# Altium PCB PCB1.PcbDoc
Units mm, origin at the board's own origin, x right, y up, seen from the top; angles counter-clockwise.
Board outline 100.08 x 100.08 mm, 2 copper layers (Top Layer, Bottom Layer); 19 components, 29 nets, 101 pads, 0 vias.
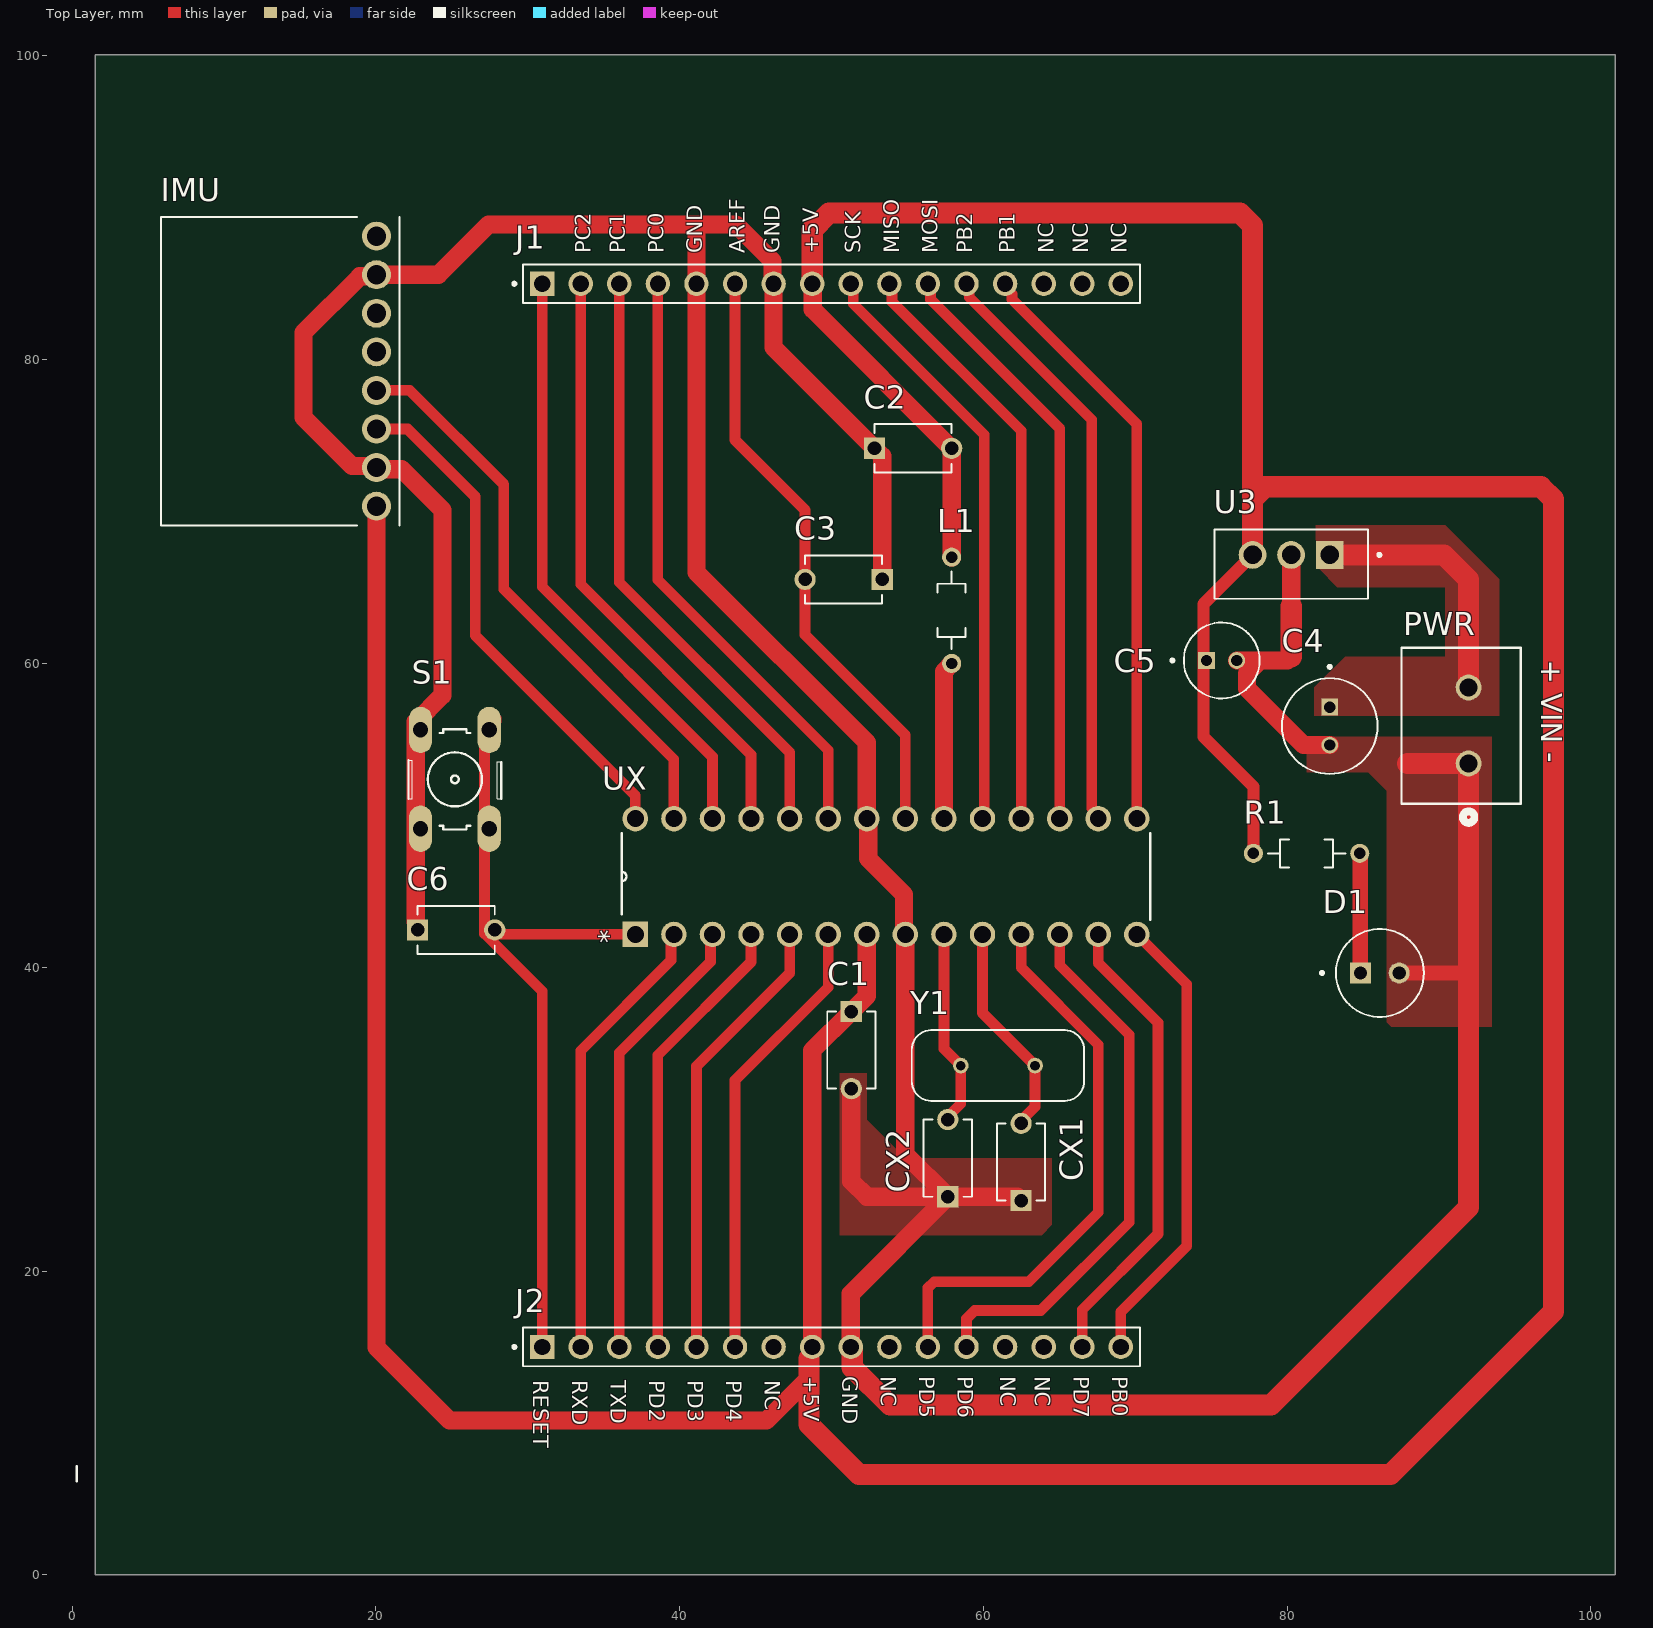
[diagram p0: Top Layer view]
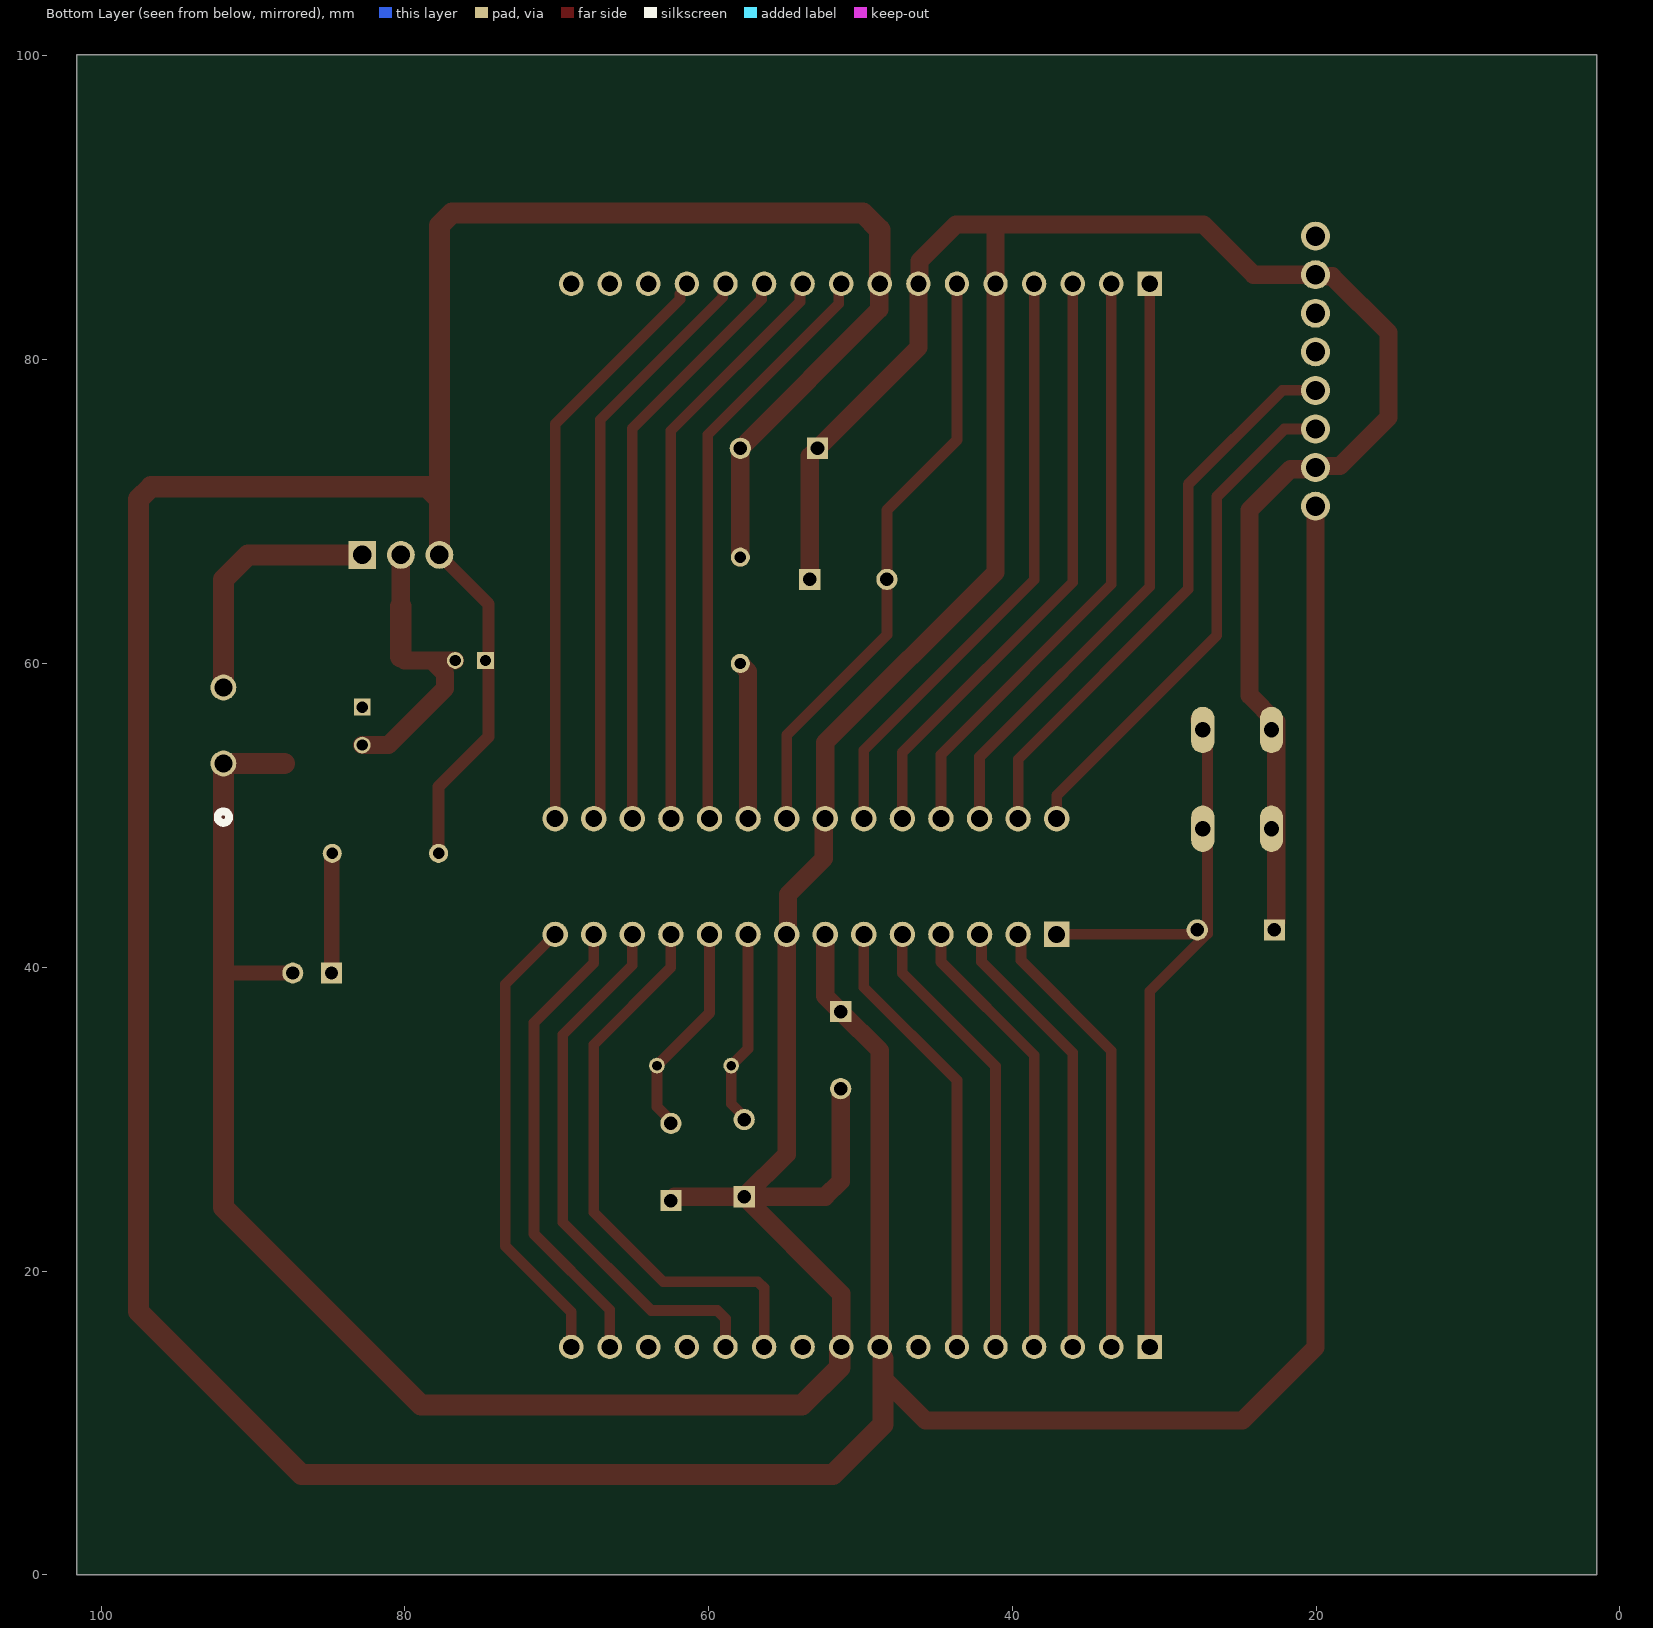
[diagram p1: Bottom Layer view, seen from below]
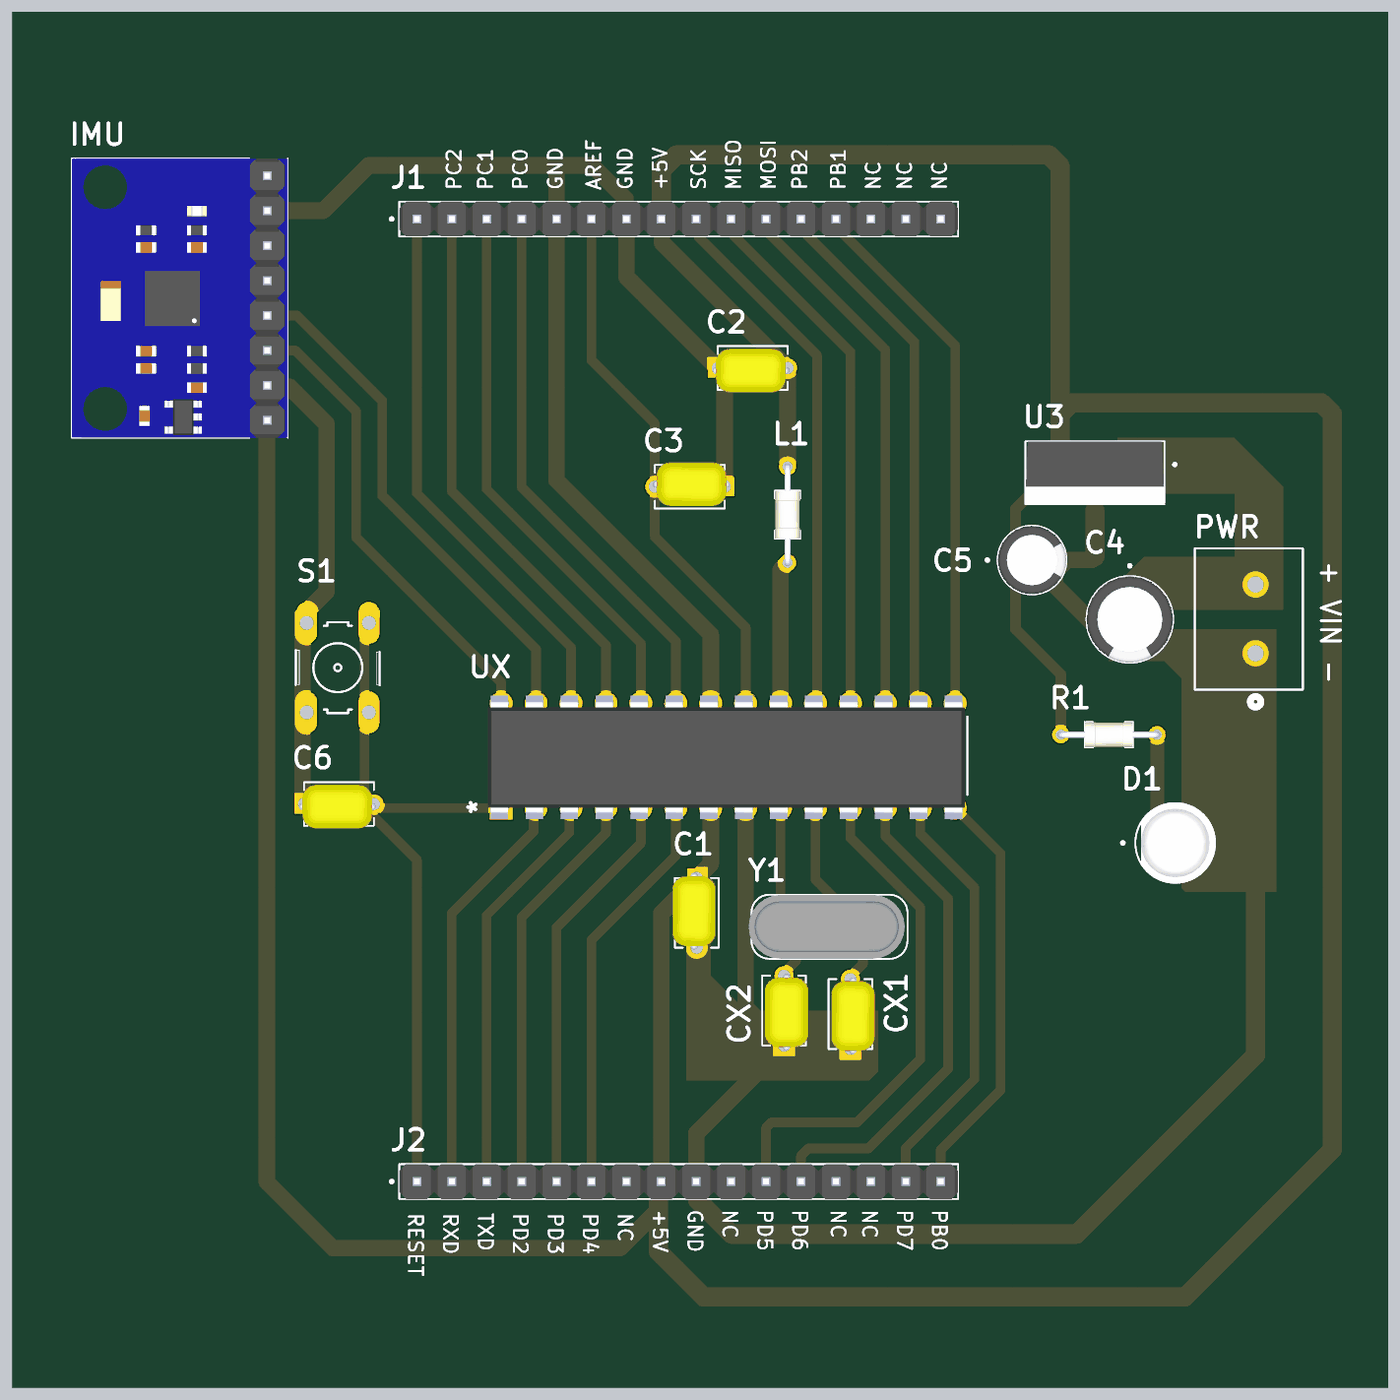
[diagram p2: 3D render of the assembled board from above, using the file's embedded part models]

## Layer stack, top to bottom
Top Solder: solder mask 0.0102, Solder Resist, Dk 3.5
Top Layer: signal copper 0.0356
Dielectric 1: dielectric 0.32, FR-4, Dk 4.8
Bottom Layer: signal copper 0.0356
Bottom Solder: solder mask 0.0102, Solder Resist, Dk 3.5

## Board outline
1.524,0 1.524,100.076 101.6,100.076 101.6,0

## Design rules (kind name [scope] priority, off if disabled: settings)
Clearance [All] p1: gap=0.8 ignorepadtopadclearanceinfootprint=TRUE except(1: THPad-Fill THPad-Poly THPad-Region Via-Fill Via-Poly Via-Region; 1.2: Arc-Arc Arc-Track Arc-Fill Arc-Poly Arc-Region Track-Track Track-Fill Track-Poly Track-Region Fill-Fill Fill-Poly Fill-Region Fill-Hole Poly-Poly Poly-Region Poly-Hole Region-Region Region-Hole)
PlaneConnect [All] p1: planeconnectstyle=Direct reliefexpansion=0.508 reliefentries=4 reliefconductorwidth=0.254 reliefairgap=0.254
PolygonConnect [All] p1: connectstyle=Direct reliefconductorwidth=0.254 reliefentries=4 polygonreliefangle="90 Angle" airgapwidth=0.254
RoutingVias [All] p1: holewidth=0.711 width=1.27 viastyle="Through Hole" minholewidth=0.711 minwidth=1.27 maxholewidth=0.711 maxwidth=1.27
SolderMaskExpansion [All] p1: expansion=0.102 istentingtop=FALSE
SupplyNets "Schematic Supply Nets_2" [InNet('VCC')] p1: voltage=0.000
SupplyNets "Schematic Supply Nets_1" [InNet('+5')] p2: voltage=0.000
SupplyNets "Schematic Supply Nets" [InNet('GND')] p3: voltage=0.000
Width [All] p1: maxlimit=1.4 minlimit=0.7 preferedwidth=0.7 minimp=50.000000 maximp=50.000000 favimp=50.000000
29 further rules are at their usual default settings.

## Components (designator, comment, footprint, x,y, rotation, side; value= is the part's Value field where it differs from the comment)
C1 "100nF" CAPRR508W50L508T318H762 51.308,34.544 r270 top
C2 "100nF" CAPRR508W50L508T318H762 55.372,74.168 r0 top
C3 "100nF" CAPRR508W50L508T318H762 50.8,65.532 r180 top
C4 "100uF" CAPPRD250W50D630H1120 82.804,55.88 r270 top
C5 "10uF" CAPPRD200W50D500H1100 75.692,60.198 r0 top
C6 "100nF" CAPRR508W50L508T318H762 25.29,42.458 r0 top
CX1 "22pf" CAPRR508W50L508T318H762 62.484,27.178 r90 top
CX2 "22pf" CAPRR508W50L508T318H762 57.658,27.432 r90 top
D1 "RED" LEDRD254W51D580H870 86.106,39.624 r0 top
IMU "OC09600" MODULE_OC09600 13.716,79.248 r180 top (schematic designator U2)
J1 "M20-9991646" HARWIN_M20-9991646 50,85 r0 top
J2 "M20-9991646" HARWIN_M20-9991646 50,15 r0 top
L1 "10uH" RESAD700W45L350D185 57.912,63.5 r270 top
PWR "395930602" CONN_SD-39543-004_NONE_02P_MOL 91.948,53.416 r90 top (schematic designator J3)
R1 "330" RESAD700W45L350D185 81.28,47.498 r0 top
S1 "PUSH" B3F-1020 25.204,52.372 r90 top
U3 "LM7805T" TO254P1011X457X1950-3 80.264,66.548 r180 top
UX "ATMEGA8A-PU" DIP254P762X457-28 70.104,49.784 r90 top
Y1 "16Mhz" XTAL_ECS-160-18-4X-EM 60.96,33.528 r180 top

## Footprints (in the part's own frame and the unit in brackets; to place one, negate y for a bottom-side part, rotate by r counter-clockwise, add the part's x,y. Pads: shape width x height; smd on the part's side, far side on the other; paste and mask are expansions set on the pad)
B3F-1020 [mil]
  oval 120x60 hole 40 mask+4.02: 1(-128,89) 2(128,89) 3(-128,-89) 4(128,-89)
  silkscreen extent -1820,-120 130,980, body extent -148,-121 155,115, height 207
CAPPRD200W50D500H1100 [mm]
  round 1.1 hole 0.75: N(1,0)
  rect 1.1x1.1 hole 0.75: P(-1,0)
  silkscreen extent -3.35,-2.5 2.5,2.5, body extent -2.5,-2.5 2.5,2.5, height 11
CAPPRD250W50D630H1120 [mm]
  round 1.1 hole 0.75: N(1.25,0)
  rect 1.1x1.1 hole 0.75: P(-1.25,0)
  silkscreen extent -4,-3.15 3.15,3.15, body extent -3.15,-3.15 3.15,3.15, height 11.2
CAPRR508W50L508T318H762 [mm]
  rect 1.398x1.398 / inner round 1.398 / far side rect 1.398x1.398 hole 0.89: 1(-2.54,0)
  round 1.398 hole 0.89: 2(2.54,0)
  silkscreen extent -2.54,-1.59 2.54,1.59, body extent -2.92,-1.78 2.67,1.4, height 8.15
CONN_SD-39543-004_NONE_02P_MOL [mil]
  round 67 hole 47 mask+4.02: 1(0,0) 2(197,0)
  silkscreen extent -154,-135 300,174, body extent -98,-120 298,180, height 395
DIP254P762X457-28 [mil]
  rect 66x66 / inner round 66 / far side rect 66x66 hole 44: 1(-300,1300)
  round 66 hole 44: 2(-300,1200) 3(-300,1100) 4(-300,1000) 5(-300,900) 6(-300,800) 7(-300,700) 8(-300,600) 9(-300,500) 10(-300,400) 11(-300,300) 12(-300,200) 13(-300,100) 14(-300,0) 15(0,0) 16(0,100) 17(0,200) 18(0,300) 19(0,400) 20(0,500) 21(0,600) 22(0,700) 23(0,800) 24(0,900) 25(0,1000) 26(0,1100) 27(0,1200) 28(0,1300)
  silkscreen extent -262,-35 -38,1335, body extent -355,-28 45,1338, height 180
HARWIN_M20-9991646 [mm]
  rect 1.605x1.605 / inner round 1.605 / far side rect 1.605x1.605 hole 1.07: 1(-19.05,0)
  round 1.605 hole 1.07: 2(-16.51,0) 3(-13.97,0) 4(-11.43,0) 5(-8.89,0) 6(-6.35,0) 7(-3.81,0) 8(-1.27,0) 9(1.27,0) 10(3.81,0) 11(6.35,0) 12(8.89,0) 13(11.43,0) 14(13.97,0) 15(16.51,0) 16(19.05,0)
  silkscreen extent -20.98,-1.27 20.32,1.27, body extent -20.32,-1.27 20.32,1.27, height 8.74
LEDRD254W51D580H870 [mm]
  rect 1.378x1.378 / inner round 1.378 / far side rect 1.378x1.378 hole 0.87 mask+0.102: 1(-1.27,0)
  round 1.378 hole 0.87 mask+0.102: 2(1.27,0)
  silkscreen extent -3.91,-2.9 2.9,2.9, body extent -2.5,-2.9 2.9,2.9, height 8.7
MODULE_OC09600 [mm]
  round 1.905 hole 1.27 mask+0.102: AD0(-6.33,-6.35) GND(-6.33,6.35) INT(-6.33,-8.89) SCL(-6.33,3.81) SDA(-6.33,1.27) VCC(-6.33,8.89) XCL(-6.33,-3.81) XDA(-6.33,-1.27)
  silkscreen extent -7.85,-10.15 7.85,10.15, body extent -7.85,-10.16 7.85,10.16, height 7.06
RESAD700W45L350D185 [mm]
  round 1.258 hole 0.75: 1(-3.5,0) 2(3.5,0)
  silkscreen extent -2.55,-0.92 2.55,0.92, body extent -3.72,-0.92 3.72,0.92, height 1.84
TO254P1011X457X1950-3 [mm]
  rect 1.83x1.83 / inner round 1.83 / far side rect 1.83x1.83 hole 1.22 mask+0.102: 1(-2.54,-0.6)
  round 1.83 hole 1.22 mask+0.102: 2(0,-0.6) 3(2.54,-0.6)
  silkscreen extent -5.9,-2.28 5.05,2.28, body extent -5.08,-2.28 5.08,2.28, height 19.5
XTAL_ECS-160-18-4X-EM [mm]
  round 1.03 hole 0.63: 1(-2.44,0) 2(2.44,0)
  silkscreen extent -5.68,-2.33 5.68,2.33, body extent -5.47,-2.32 5.88,2.32, height 3.5

## Part data
C1 C2 C3 C6: library part AR215C104K4R, "AR 100nF Ceramic Multilayer Cap,50V dc,+125C,X7R Dielectric,+/-10%,Through Hole", Package="Radial AVX", Check_prices=https://www.snapeda.com/parts/AR215C104K4R/AVX/view-part/?ref=eda, MF=AVX, MP=AR215C104K4R, SnapEDA_Link=https://www.snapeda.com/parts/AR215C104K4R/AVX/view-part/?ref=snap
C4: library part EEUHD1E101, "Ø®Ø§Ø²Ù† Ù‡Ø§ÛŒ Ø§Ù„Ú©ØªØ±ÙˆÙ„ÛŒØªÛŒ Ø¢Ù„ÙˆÙ…ÛŒÙ†ÛŒÙˆÙ…ÛŒ 100F 25V Ø´Ø¹Ø§Ø¹ÛŒØŒ Ù‚ÙˆØ·ÛŒ 1000 Ø³Ø§Ø¹Øª @ 105C", Package="RADIAL-2 Panasonic", Availability="In Stock", Check_prices=https://www.snapeda.com/parts/EEU-HD1E101/Panasonic/view-part/?ref=eda, MF=Panasonic, MP=EEU-HD1E101, Price=None, Purchase-URL=https://pricing.snapeda.com/search/part/EEU-HD1E101/?ref=eda, SnapEDA_Link=https://www.snapeda.com/parts/EEU-HD1E101/Panasonic/view-part/?ref=snap
C5: library part ECA1CM100, "10F 16V Aluminum Electrolytic Capacitors Radial, Can 2000 Hrs @ 85C", Package="RADIAL-2 Panasonic", Availability="In Stock", Check_prices=https://www.snapeda.com/parts/ECA-1CM100/Panasonic/view-part/235834/?ref=eda, MF=Panasonic, MP=ECA-1CM100, Price=None, Purchase-URL=https://pricing.snapeda.com/search/part/ECA-1CM100/?ref=eda, SnapEDA_Link=https://www.snapeda.com/parts/ECA-1CM100/Panasonic/view-part/235834/?ref=snap
CX1 CX2: library part AR215C104K4R, "22pF", Package="Radial AVX", Check_prices=https://www.snapeda.com/parts/AR215C104K4R/AVX/view-part/?ref=eda, MF=AVX, MP=AR215C104K4R, SnapEDA_Link=https://www.snapeda.com/parts/AR215C104K4R/AVX/view-part/?ref=snap
D1: library part OVLFR3C7, "Red 5 mm 30Â° Clear 5000 mcd 2.2 V Round LED Lamp Through Hole", Package="Radial Optek", Check_prices=https://www.snapeda.com/parts/OVLFR3C7/Optek/view-part/?ref=eda, MF=Optek, MP=OVLFR3C7, SnapEDA_Link=https://www.snapeda.com/parts/OVLFR3C7/Optek/view-part/?ref=snap
IMU: "GY-521 6 DOF MPU-6050 Module 3 Axis Accelerometer Gyroscope Module for Arduino", Package=None, Check_prices=https://www.snapeda.com/parts/OC09600/YKS/view-part/?ref=eda, MF=YKS, MP=OC09600, SnapEDA_Link=https://www.snapeda.com/parts/OC09600/YKS/view-part/?ref=snap
J1 J2: "2.54mm (0.1) Pitch SIL Vertical Throughboard Pin Header, 6.1mm mating pin height, tin, 16 contacts", Package=None, Check_prices=https://www.snapeda.com/parts/M20-9991646/Harwin/view-part/?ref=eda, MF=Harwin, MP=M20-9991646, SnapEDA_Link=https://www.snapeda.com/parts/M20-9991646/Harwin/view-part/?ref=snap
L1: library part "FERRITE BEAD 10uH", "FERRITE BEAD", Package=None, Power_Rating=".25 W", Tolerance=5%, Voltage_Rating="200 V", Check_prices=https://www.snapeda.com/parts/2-1623927-3/TE+Connectivity/view-part/?ref=eda, EU_RoHS_Compliance=Compliant, MF="TE Connectivity", MP=2-1623927-3, Reactance=10uH, SnapEDA_Link=https://www.snapeda.com/parts/2-1623927-3/TE+Connectivity/view-part/?ref=snap
PWR: Package=None, Availability=Unavailable, MP=395930602, Price=None
R1: library part 2-1623927-3, "Carbon Film Resistors - Through Hole 1K Ohm 5% 1/4W Res Carbon Film", Package=None, Power_Rating=".25 W", Resistance=1K, Tolerance=5%, Voltage_Rating="200 V", Check_prices=https://www.snapeda.com/parts/2-1623927-3/TE+Connectivity/view-part/?ref=eda, EU_RoHS_Compliance=Compliant, MF="TE Connectivity", MP=2-1623927-3, SnapEDA_Link=https://www.snapeda.com/parts/2-1623927-3/TE+Connectivity/view-part/?ref=snap
S1: library part B3F-1020, "Switch Tactile N.O. SPST Flat Round Button PC Pins 0.05A 24VDC 0.98N Thru-Hole Bag", Package=None, Check_prices=https://www.snapeda.com/parts/B3F1020/Omron/view-part/?ref=eda, MF=Omron, MP=B3F1020, SnapEDA_Link=https://www.snapeda.com/parts/B3F1020/Omron/view-part/?ref=snap
U3: "3-Terminal 1.5A Positive Fixed Voltage Regulator", Package="TO-220-3 TAEJIN", Check_prices=https://www.snapeda.com/parts/LM7805T/TAEJIN/view-part/?ref=eda, MF=TAEJIN, MP=LM7805T, SnapEDA_Link=https://www.snapeda.com/parts/LM7805T/TAEJIN/view-part/?ref=snap
UX: "AVR AVRÂ® ATmega Microcontroller IC 8-Bit 16MHz 8KB (4K x 16) FLASH 28-PDIP", Package="PDIP-28 TE Connectivity", Check_prices=https://www.snapeda.com/parts/ATMEGA8A-PU/Microchip/view-part/?ref=eda, MF=Microchip, MP=ATMEGA8A-PU, SnapEDA_Link=https://www.snapeda.com/parts/ATMEGA8A-PU/Microchip/view-part/?ref=snap
Y1: library part ECS-160-18-4X-EM, "16 MHz Â±30ppm Crystal 18pF 40 Ohms HC-49/US", Package="HC-49USX-4X-2 ECS", Check_prices=https://www.snapeda.com/parts/ECS-160-18-4X-EM/ECS/view-part/?ref=eda, MF="ECS Inc.", MP=ECS-160-18-4X-EM, SnapEDA_Link=https://www.snapeda.com/parts/ECS-160-18-4X-EM/ECS/view-part/?ref=snap

## Nets (pads, with @x,y where several pads share a name; then routed paths per layer and width w, separated by ;. In a path a pad name is that pad's centre, name@x,y a point inside that pad or via, vN(x,y) a via of type N, cw(c..) or ccw(c..) an arc to the next point about the centre after c; other vN are vias at no path point)
+5: C1.1 C2.2 C5.P IMU.VCC J1.8 J2.8 L1.1 R1.1 U3.3 UX.7 | length 348
  Top Layer w0.8: U3.3 74.492,63.916 74.492,55.173 77.78,51.885 R1.1
  Top Layer w1.2: IMU.VCC 20.046,14.966 24.852,10.16 45.72,10.16 48.525,12.965 ; J2.8 48.73,34.506 C1.1 52.324,38.1 UX.7 ; J1.8 48.769,84.961 48.769,83.311 C2.2 L1.1
  Top Layer w1.4: 48.525,14.22 48.525,12.965 48.525,9.895 51.816,6.604 86.81,6.604 97.536,17.33 97.536,70.808 96.716,71.628 78.544,71.628 77.724,70.808 ; J1.8 48.73,88.55 49.842,89.662 76.904,89.662 77.724,88.842 77.724,70.808 ; U3.3 77.724,70.808
AREF: C3.2 J1.6 UX.21 | length 39.9
  Top Layer w0.7: J1.6 43.65,74.714 48.26,70.104 C3.2 48.26,61.894 54.864,55.29 UX.21
GND: C1.2 C2.1 C3.1 C4.N C5.N C6.1 CX1.1 CX2.1 D1.2 IMU.AD0 IMU.GND J1.5 J1.7 J2.9 PWR.1 S1.1 S1.2 U3.2 UX.8 UX.22 | length 310.6
  Top Layer w1: D1.2 91.694,39.624 91.948,39.878
  Top Layer w1.2: C6.1@22.631,42.977 22.631,49.479 22.631,56.159 24.384,57.912 24.384,70.104 21.695,72.793 20.151,72.793 19.941,73.003 18.437,73.003 15.24,76.2 15.24,81.788 18.945,85.493 19.941,85.493 IMU.AD0 24.13,85.598 27.432,88.9 41.148,88.9 ; J2.9 51.27,18.504 CX2.1 ; C1.2 51.308,25.908 52.324,24.892 CX2.1 ; C3.1 53.34,73.66 C2.1 46.19,80.81 J1.7 46.113,85.077 46.113,86.5 43.712,88.9 41.148,88.9 ; CX1.1 62.23,24.892 CX2.1 ; C5.N 78.218,60.198 ; 80.01,60.198 78.218,60.198 ; 80.264,63.77 U3.2 ; C4.N 81.084,54.63 77.364,58.35 77.364,59.344 78.218,60.198 ; 41.148,88.9 41.11,88.862 J1.5 41.11,66.004 52.324,54.79 UX.22 52.415,49.693 52.415,47.153 54.773,44.795 54.773,42.255 UX.8 54.864,27.686 CX2.1
  Top Layer w1.4: J2.9 51.309,14.961 51.309,14.905 51.372,14.842 51.372,13.652 53.848,11.176 78.936,11.176 91.948,24.188 91.948,39.878 PWR.1 87.942,53.416 ; 80.264,60.452 80.264,63.77
MISO: J1.10 UX.18 | length 39
  Top Layer w0.7: J1.10@53.81,84.779 J1.10 53.983,84.827 53.983,83.824 62.484,75.324 UX.18
MOSI: J1.11 UX.17 | length 39
  Top Layer w0.7: J1.11@56.35,84.779 J1.11 56.523,84.827 56.523,83.971 65.024,75.471 UX.17
NetD1_1: D1.1 R1.2 | length 7.9
  Top Layer w1: R1.2 84.808,47.47 84.808,39.652 D1.1
NetL1_2: L1.2 UX.20 | length 10.4
  Top Layer w1.2: UX.20 57.404,59.476 57.912,59.984 L1.2
PB0: J2.16 UX.14 | length 30.3
  Top Layer w0.7: J2.16 69.05,17.301 73.396,21.647 73.396,38.872 UX.14
PB1: J1.13 UX.15 | length 38.8
  Top Layer w0.7: J1.13 61.43,84.755 61.885,84.3 61.885,83.984 70.104,75.765 UX.15
PB2: J1.12 UX.16 | length 38.8
  Top Layer w0.7: J1.12 59.063,84.827 59.063,84.118 67.133,76.049 67.133,50.479 67.564,50.048 UX.16
PC0: J1.4 UX.23 | length 39.9
  Top Layer w0.7: J1.4 38.57,65.503 49.784,54.289 UX.23
PC1: J1.3 UX.24 | length 39.9
  Top Layer w0.7: J1.3 36.03,65.356 47.244,54.142 UX.24
PC2: J1.2 UX.25 | length 39.9
  Top Layer w0.7: J1.2 33.49,65.209 44.704,53.995 UX.25
PC3: J1.1 UX.26 | length 39.9
  Top Layer w0.7: J1.1 30.95,65.062 42.164,53.848 UX.26
PD2: J2.4 UX.4 | length 29.7
  Top Layer w0.7: J2.4 38.57,34.212 44.704,40.346 UX.4
PD3: J2.5 UX.5 | length 29.7
  Top Layer w0.7: J2.5 41.11,33.49 47.244,39.624 UX.5
PD4: J2.6 UX.6 | length 29.7
  Top Layer w0.7: J2.6 43.65,32.55 49.784,38.684 UX.6
PD5: J2.11 UX.11 | length 37.6
  Top Layer w0.7: J2.11 56.35,18.894 56.76,19.304 62.992,19.304 67.564,23.876 67.564,34.905 62.484,39.985 UX.11
PD6: J2.12 UX.12 | length 36
  Top Layer w0.7: J2.12 58.89,16.858 59.436,17.404 63.779,17.404 69.596,23.221 69.596,35.56 65.024,40.132 UX.12
PD7: J2.15 UX.13 | length 30.9
  Top Layer w0.7: J2.15 66.51,17.448 71.496,22.434 71.496,36.347 67.567,40.276 67.567,42.161 UX.13
RESET: C6.2 J2.1 S1.3 S1.4 UX.1 | length 53.8
  Top Layer w0.7: S1.4@27.94,56.388 27.94,56.199 27.153,55.412 27.153,49.479 27.153,42.977 ; J2.1 30.95,38.417 27.368,41.999 27.153,42.215 27.153,42.977 ; UX.1 27.533,42.164 27.153,42.545 27.153,42.977
RXD: J2.2 UX.2 | length 29.7
  Top Layer w0.7: J2.2 33.49,34.506 39.437,40.453 39.437,41.977 UX.2
SCK: J1.9 UX.19 | length 39.1
  Top Layer w0.7: J1.9@51.27,84.779 J1.9 51.443,84.827 51.443,83.677 60.062,75.059 60.062,49.902 UX.19
SCL: IMU.SCL UX.28 | length 33.9
  Top Layer w0.7: IMU.SCL 22.091,75.438 26.534,70.995 26.534,61.858 37.084,51.308 UX.28
SDA: IMU.SDA UX.27 | length 37.6
  Top Layer w0.7: IMU.SDA 22.238,77.978 28.434,71.782 28.434,64.891 39.624,53.701 UX.27
TXD: J2.3 UX.3 | length 29.7
  Top Layer w0.7: J2.3 36.03,34.359 42.037,40.366 42.037,42.037 UX.3
VCC: C4.P PWR.2 U3.1 | length 16.9
  Top Layer w1.4: U3.1 90.332,67.148 91.948,65.532 PWR.2
XTAL1: CX2.2 UX.9 Y1.2 | length 13
  Top Layer w0.7: UX.9 57.404,34.644 Y1.2 58.52,31.023 57.658,30.161 CX2.2
XTAL2: CX1.2 UX.10 Y1.1 | length 14.3
  Top Layer w0.7: UX.10 59.944,36.984 Y1.1 63.4,30.823 62.484,29.907 CX1.2
pads on no net: IMU.INT IMU.XCL IMU.XDA J1.14 J1.15 J1.16 J2.7 J2.10 J2.13 J2.14

## Polygon pours and split planes (outlines as drawn)
VCC on Top Layer "NONET_L02_P-001" (solid, remove dead copper, pour order 4): 81.788,56.573 81.788,58.42 83.82,60.452 90.424,60.452 90.424,65.024 83.312,65.024 81.896,66.44 81.896,69.088 90.424,69.088 93.98,65.532 93.98,56.573
GND on Top Layer "NONET_L02_P-001" (solid, remove dead copper, pour order 3): 81.28,55.166 93.472,55.166 93.472,36.068 86.868,36.068 86.554,36.382 86.554,51.622 85.344,52.832 81.28,52.832
GND on Top Layer "NONET_L02_P-001" (solid, remove dead copper, pour order 2): 50.292,33.02 52.324,33.02 52.324,29.972 54.864,27.432 64.516,27.432 64.516,22.86 64.008,22.352 50.292,22.352

## Silkscreen, mask and mechanical layers (free items; w line width, h text height)
Top Overlay:
  text "PC2" at 34.138,87.02 h1.02 r90
  text "PC1" at 36.424,87.02 h1.02 r90
  text "PC0" at 38.964,87.02 h1.02 r90
  text "GND" at 41.504,87.02 h1.02 r90
  text "AREF" at 44.298,87.02 h1.02 r90
  text "GND" at 46.584,87.02 h1.02 r90
  text "+5V" at 49.124,87.02 h1.02 r90
  text "SCK" at 51.918,87.02 h1.02 r90
  text "MISO" at 54.458,87.02 h1.02 r90
  text "MOSI" at 56.998,87.02 h1.02 r90
  text "PB2" at 59.284,87.02 h1.02 r90
  text "PB1" at 62.078,87.02 h1.02 r90
  text "NC" at 64.618,87.02 h1.02 r90
  text "NC" at 66.904,87.02 h1.02 r90
  text "NC" at 69.444,87.02 h1.02 r90
  text "+ VIN -" at 96.72,60.252 h1.4 r270
  text "+5V" at 48.158,13.056 h1.02 r270
  text "GND" at 50.698,13.056 h1.02 r270
  text "NC" at 53.238,13.056 h1.02 r270
  text "PD5" at 55.778,13.056 h1.02 r270
  text "PD6" at 58.318,13.056 h1.02 r270
  text "NC" at 61.112,13.056 h1.02 r270
  text "NC" at 63.398,13.056 h1.02 r270
  text "PD7" at 65.938,13.056 h1.02 r270
  text "PB0" at 68.478,13.056 h1.02 r270
  text "RESET" at 30.378,12.802 h1.02 r270
  text "RXD" at 32.918,12.802 h1.02 r270
  text "TXD" at 35.458,12.802 h1.02 r270
  text "PD2" at 37.998,12.802 h1.02 r270
  text "PD3" at 40.538,12.802 h1.02 r270
  text "PD4" at 43.078,12.802 h1.02 r270
  text "NC" at 45.618,12.802 h1.02 r270

## Text inside footprints (layer, text, board x,y; h text height)
S1: Mechanical 13 "4" at 27.998,55.928 h1.27 r90; Mechanical 13 "3" at 27.998,47.8 h1.27 r90; Mechanical 13 "2" at 23.68,55.928 h1.27 r90; Mechanical 13 "1" at 23.553,48.054 h1.27 r90
UX: Top Overlay "*" at 35.966,41.58 h1.27 r90; Mechanical 13 "*" at 35.966,41.58 h1.27 r90